# Altium PCB onV1.PcbDoc
Units mm, origin at the board's own origin, x right, y up, seen from the top; angles counter-clockwise.
Board outline 55 x 94 mm, 4 copper layers (Top Layer, Signal Layer 1, Signal Layer 2, Bottom Layer), stack 0.778 mm thick; 108 components, 42 nets, 287 pads, 47 vias.
Unrouted connection lines stored in the file: 108.
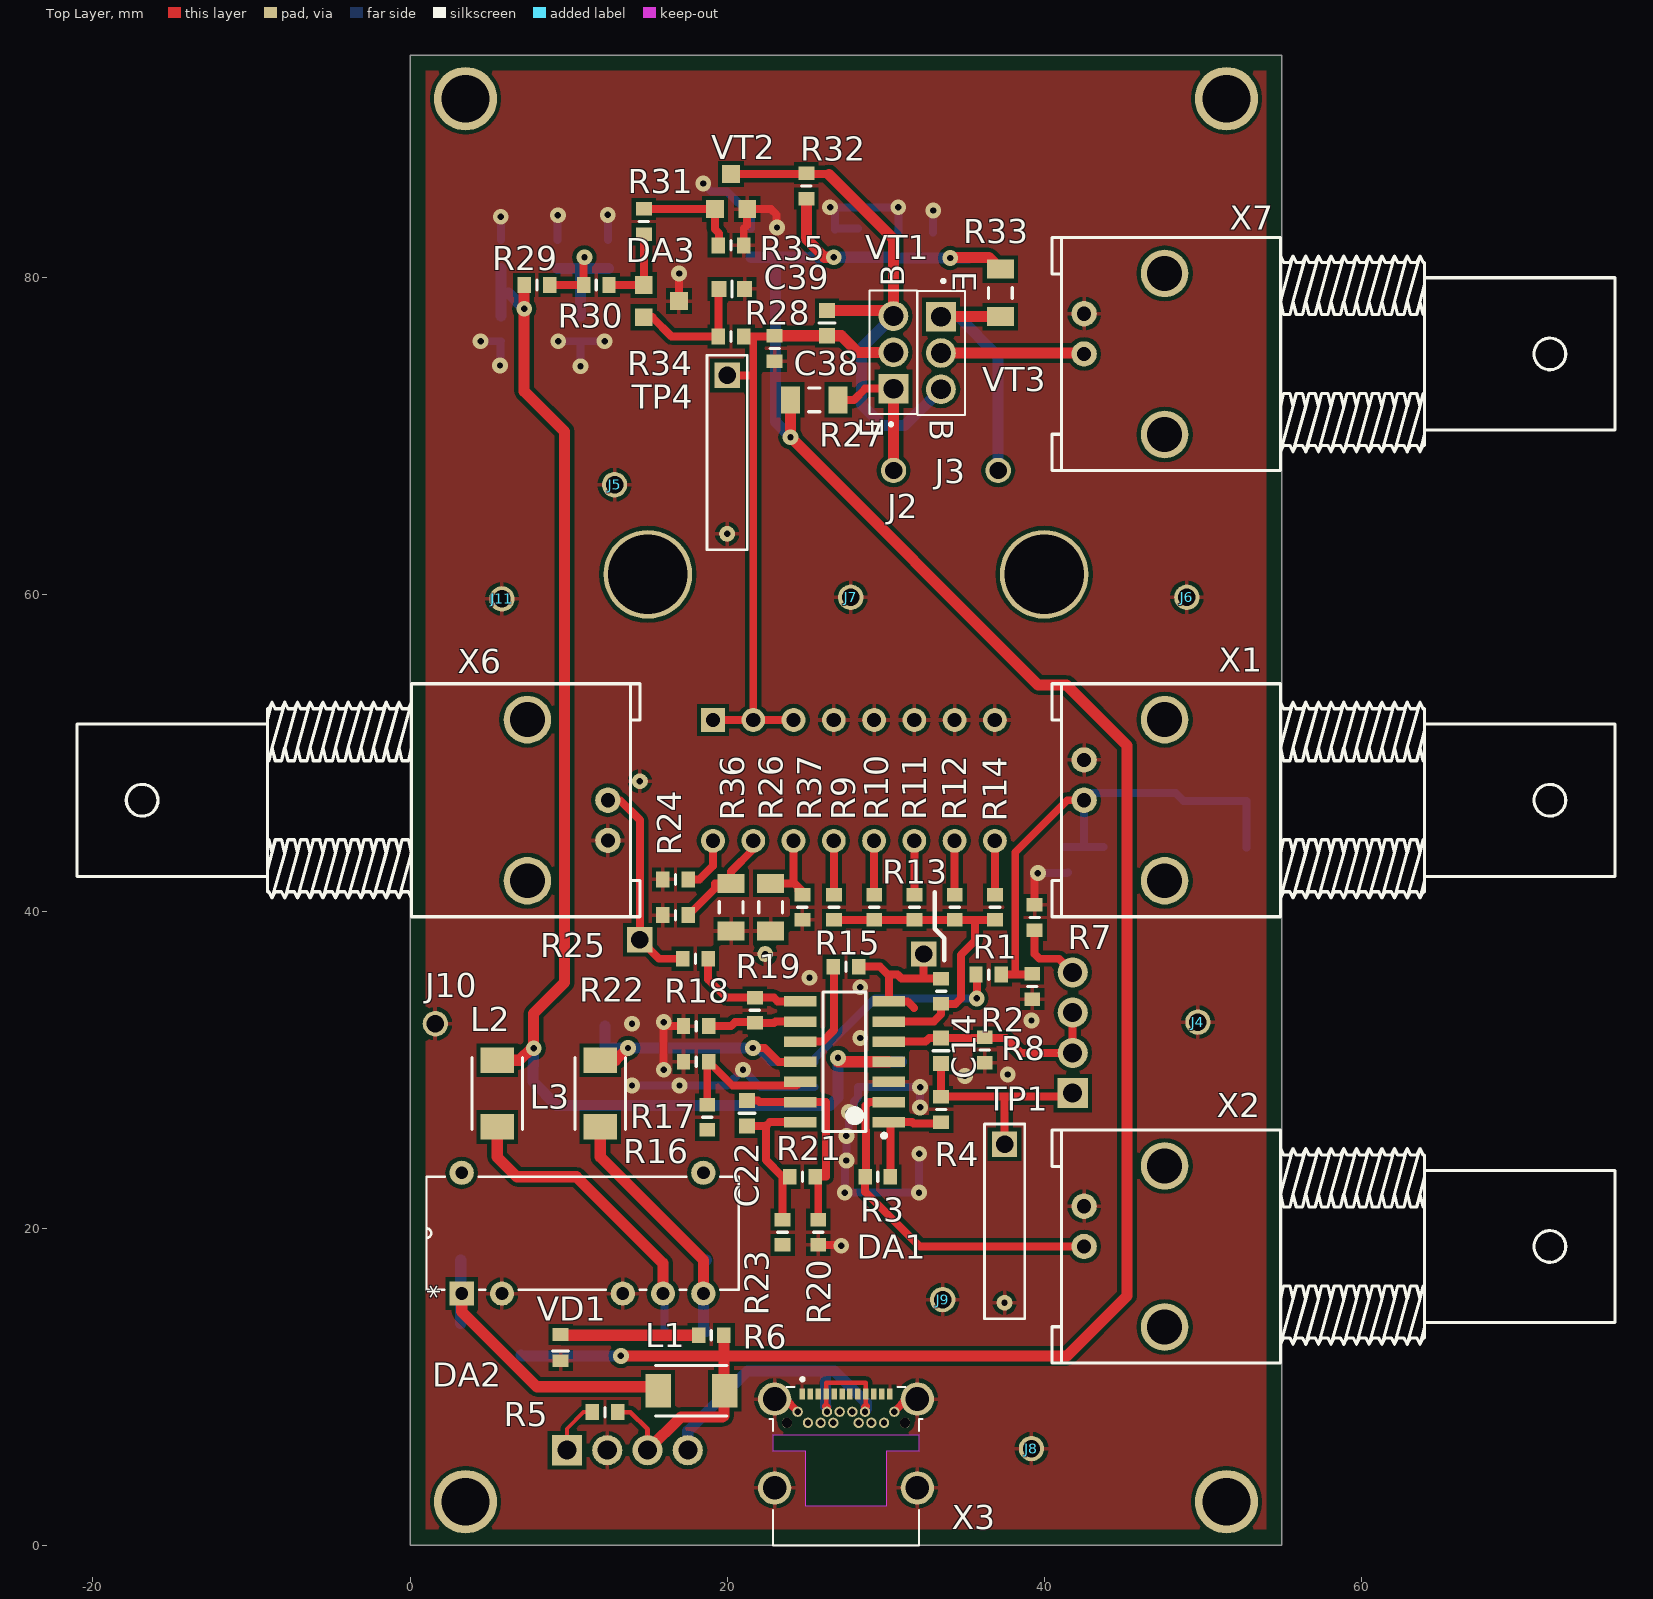
[diagram p0: Top Layer view]
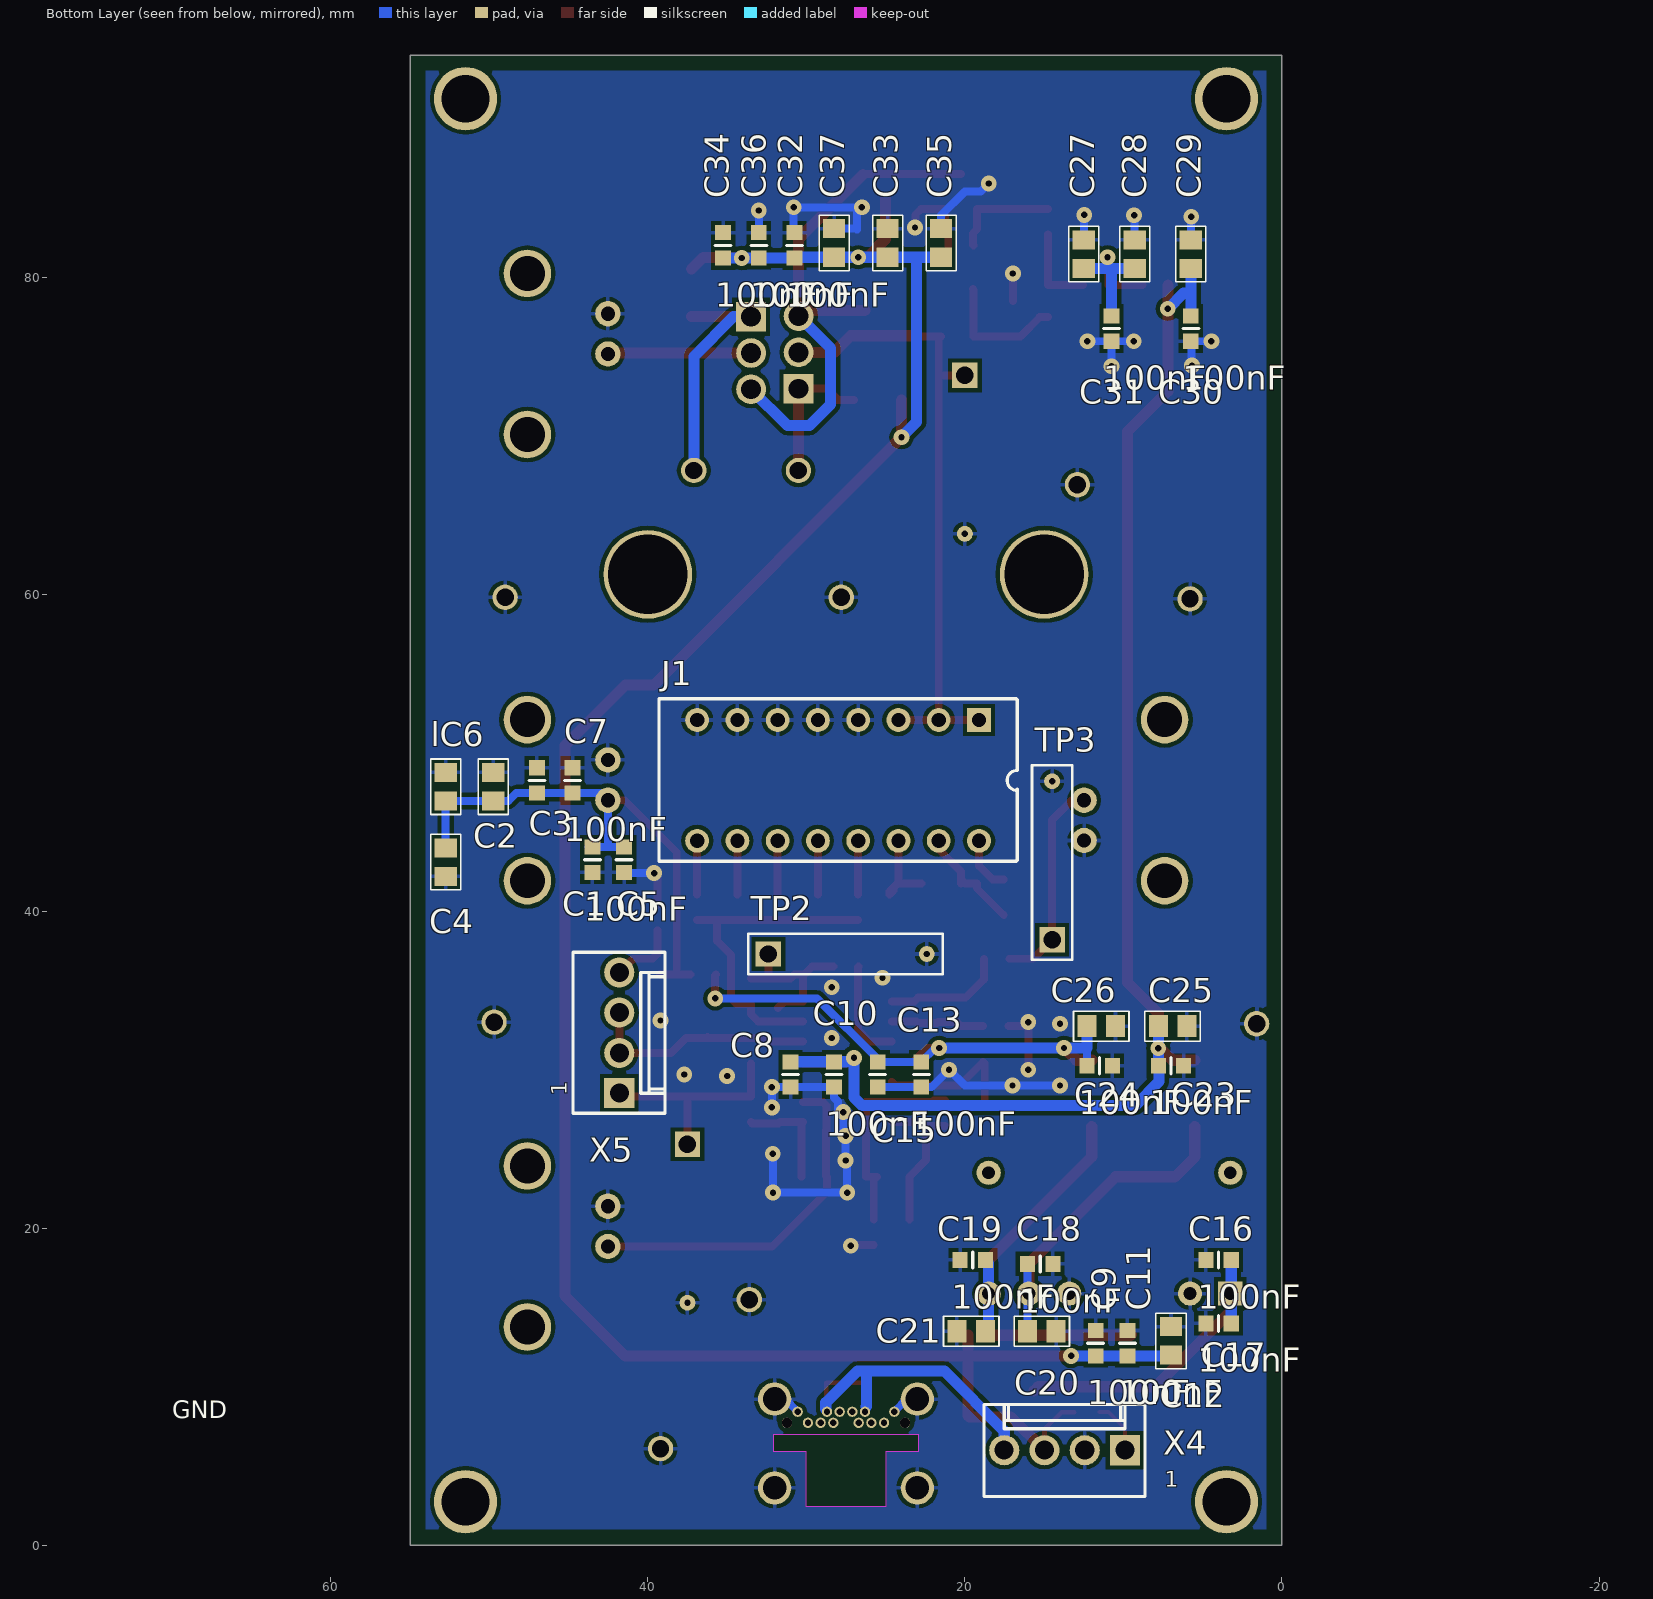
[diagram p1: Bottom Layer view, seen from below]
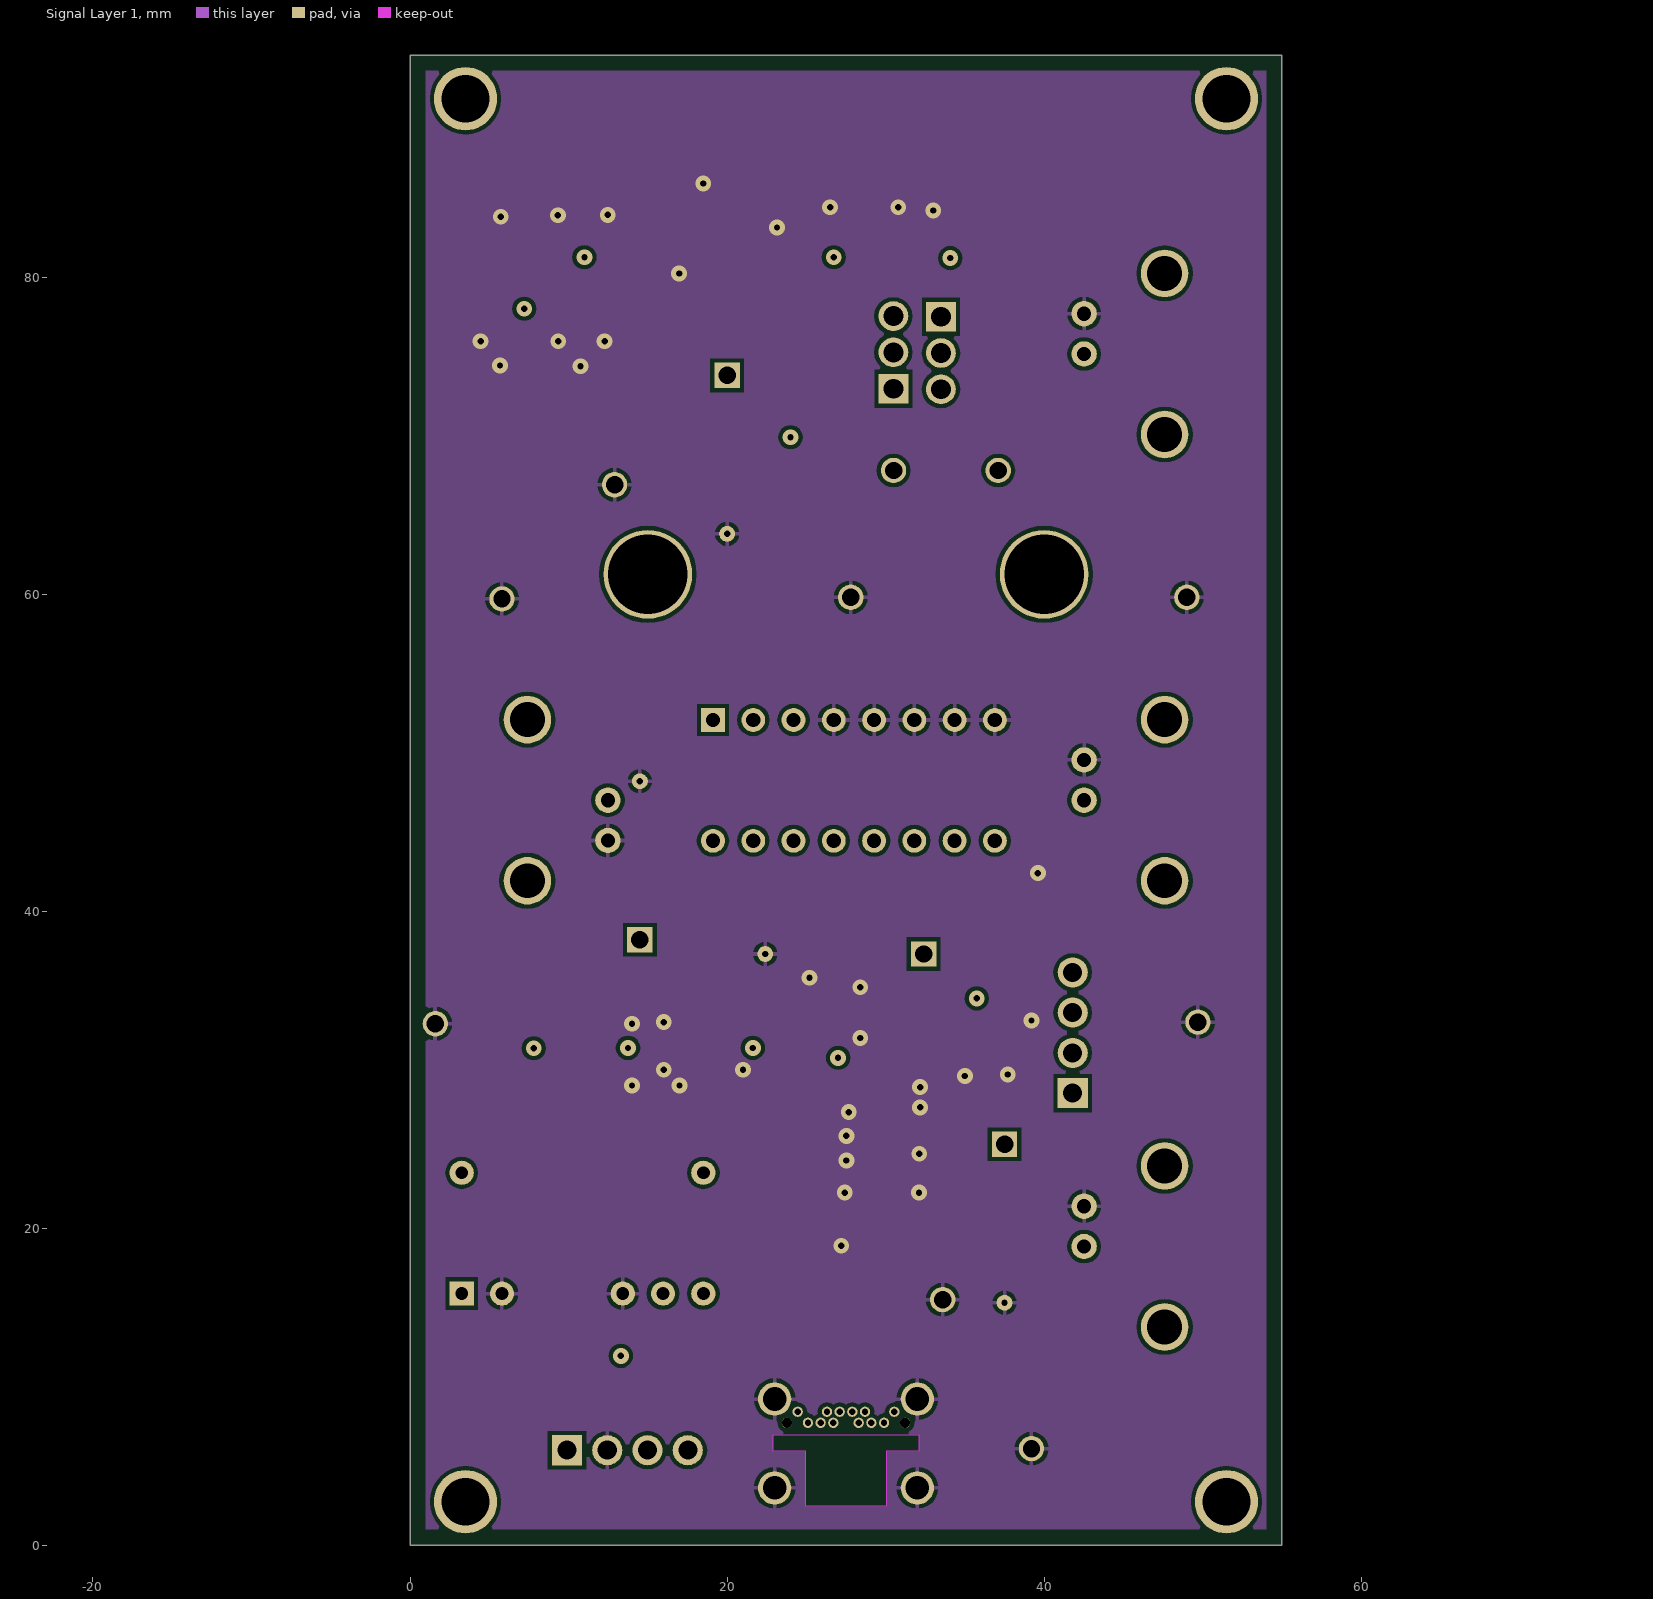
[diagram p2: Signal Layer 1]
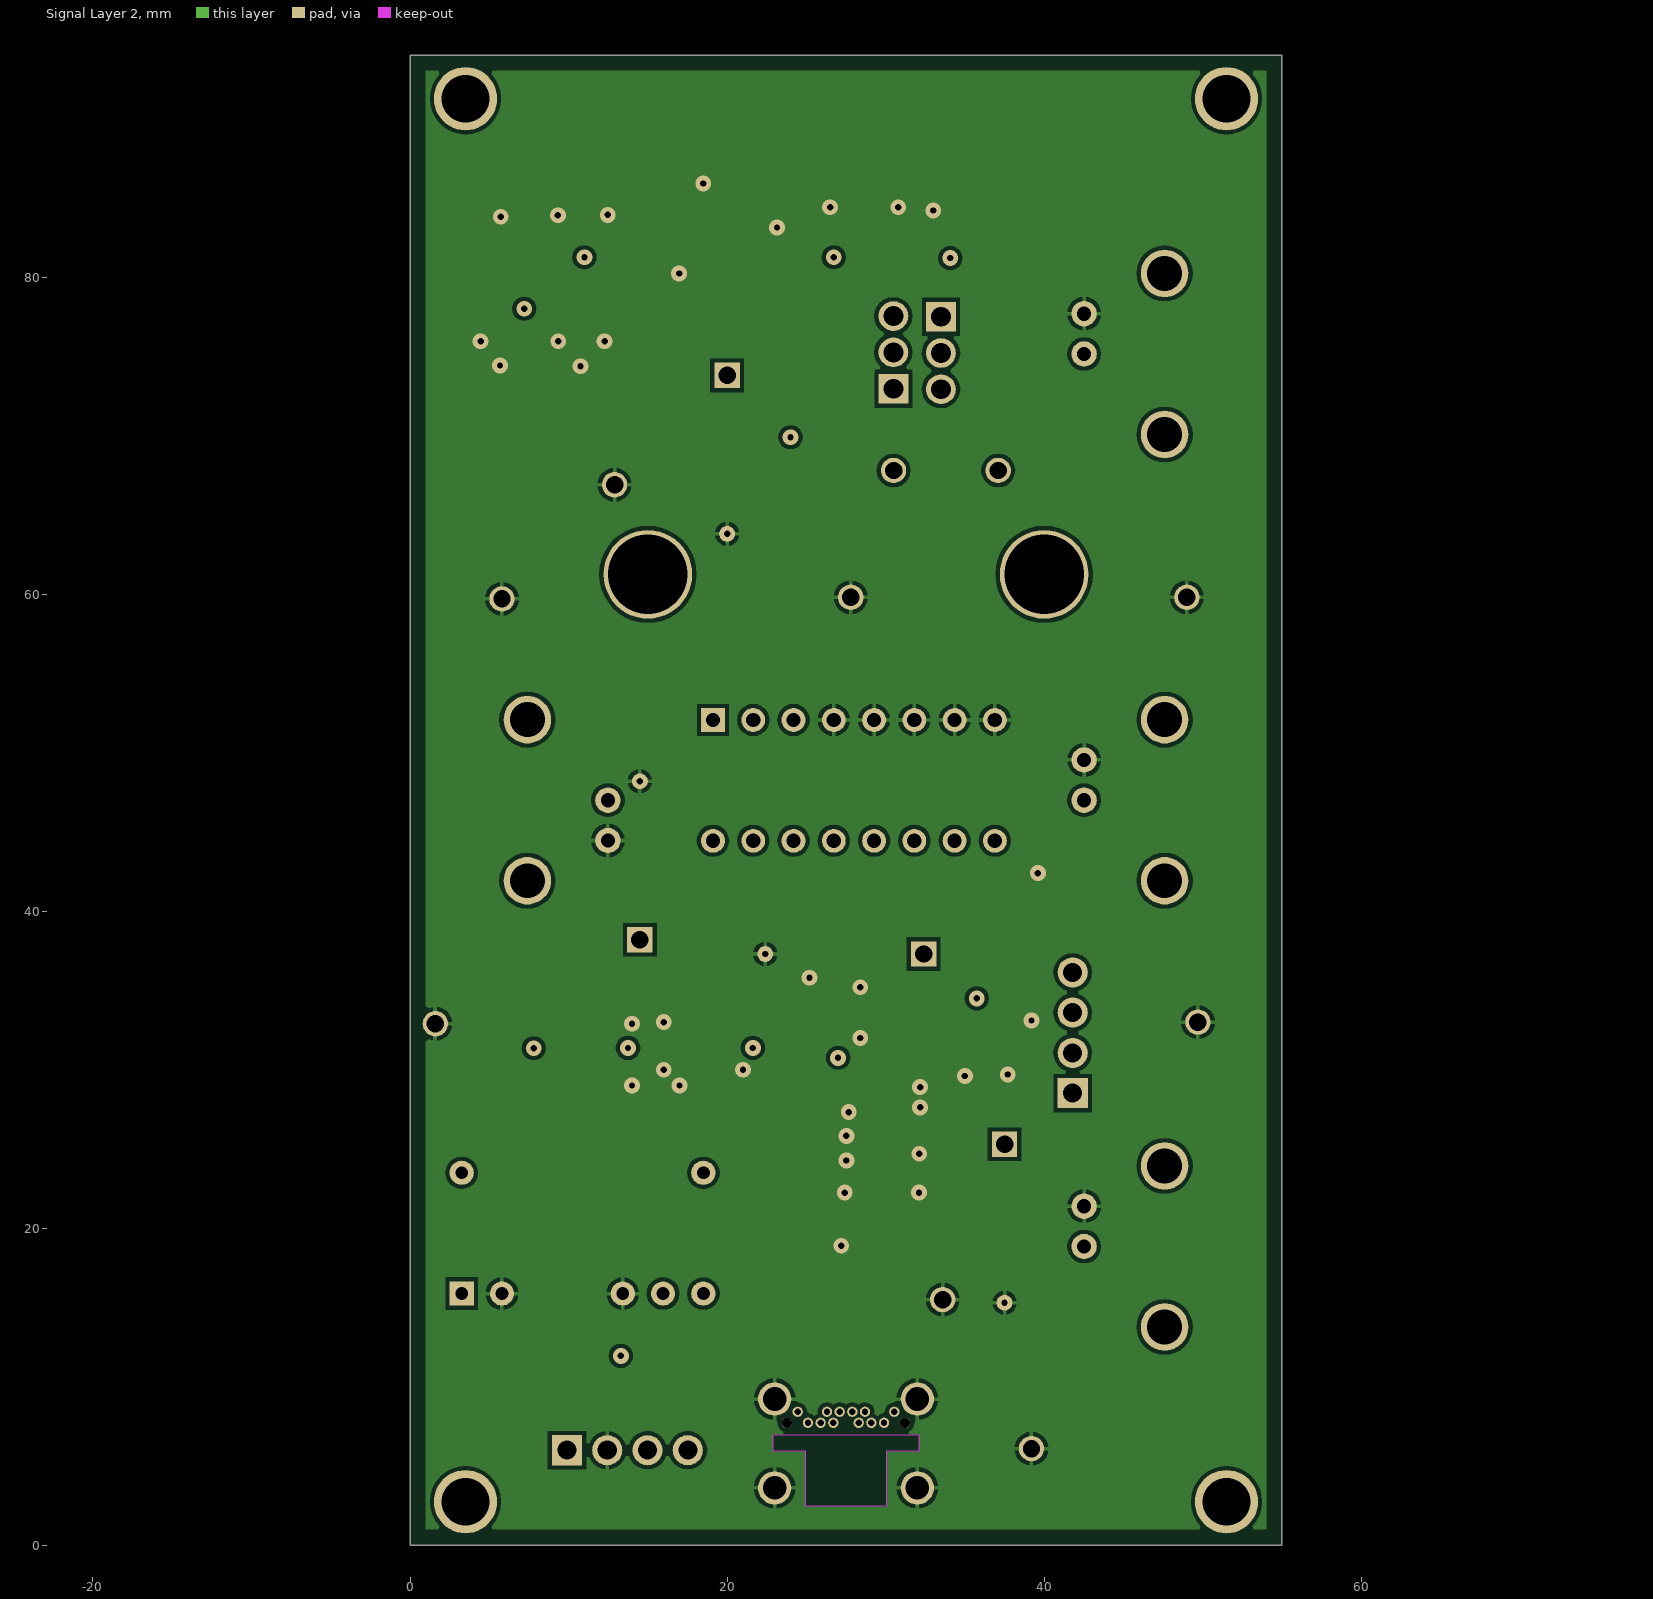
[diagram p3: Signal Layer 2]
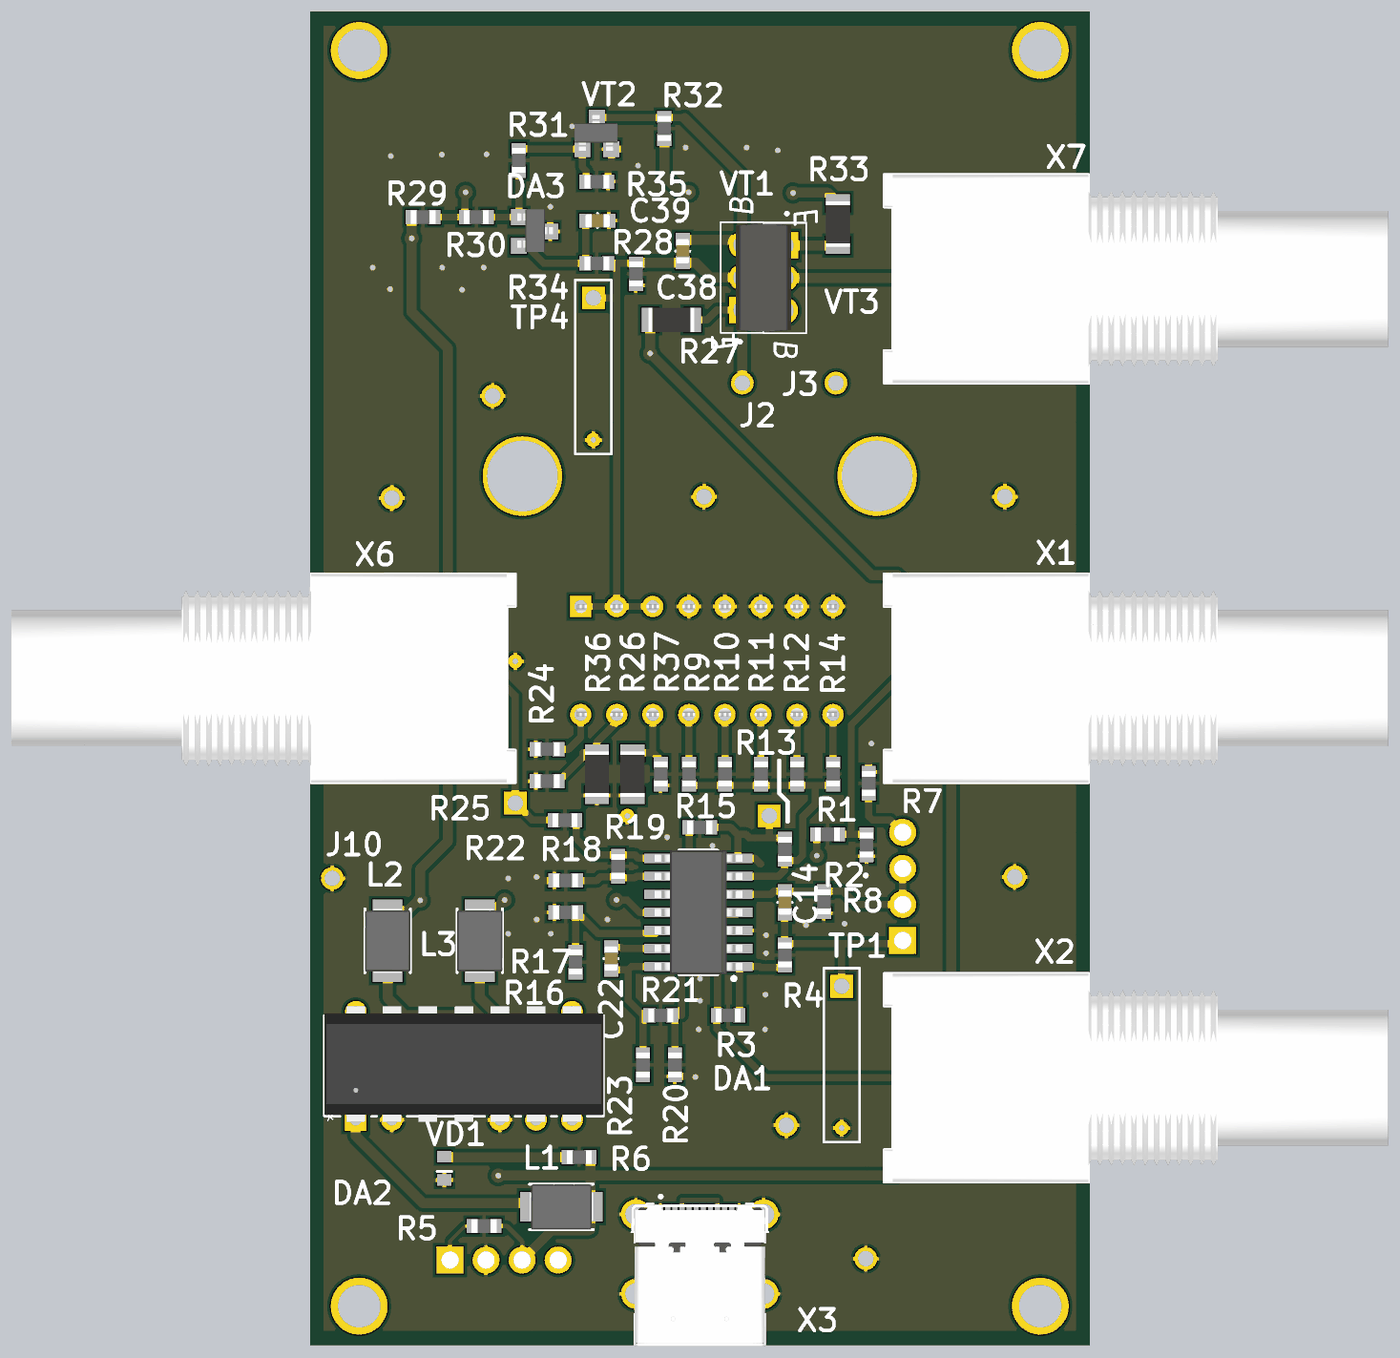
[diagram p4: 3D render of the assembled board from above, using the file's embedded part models]
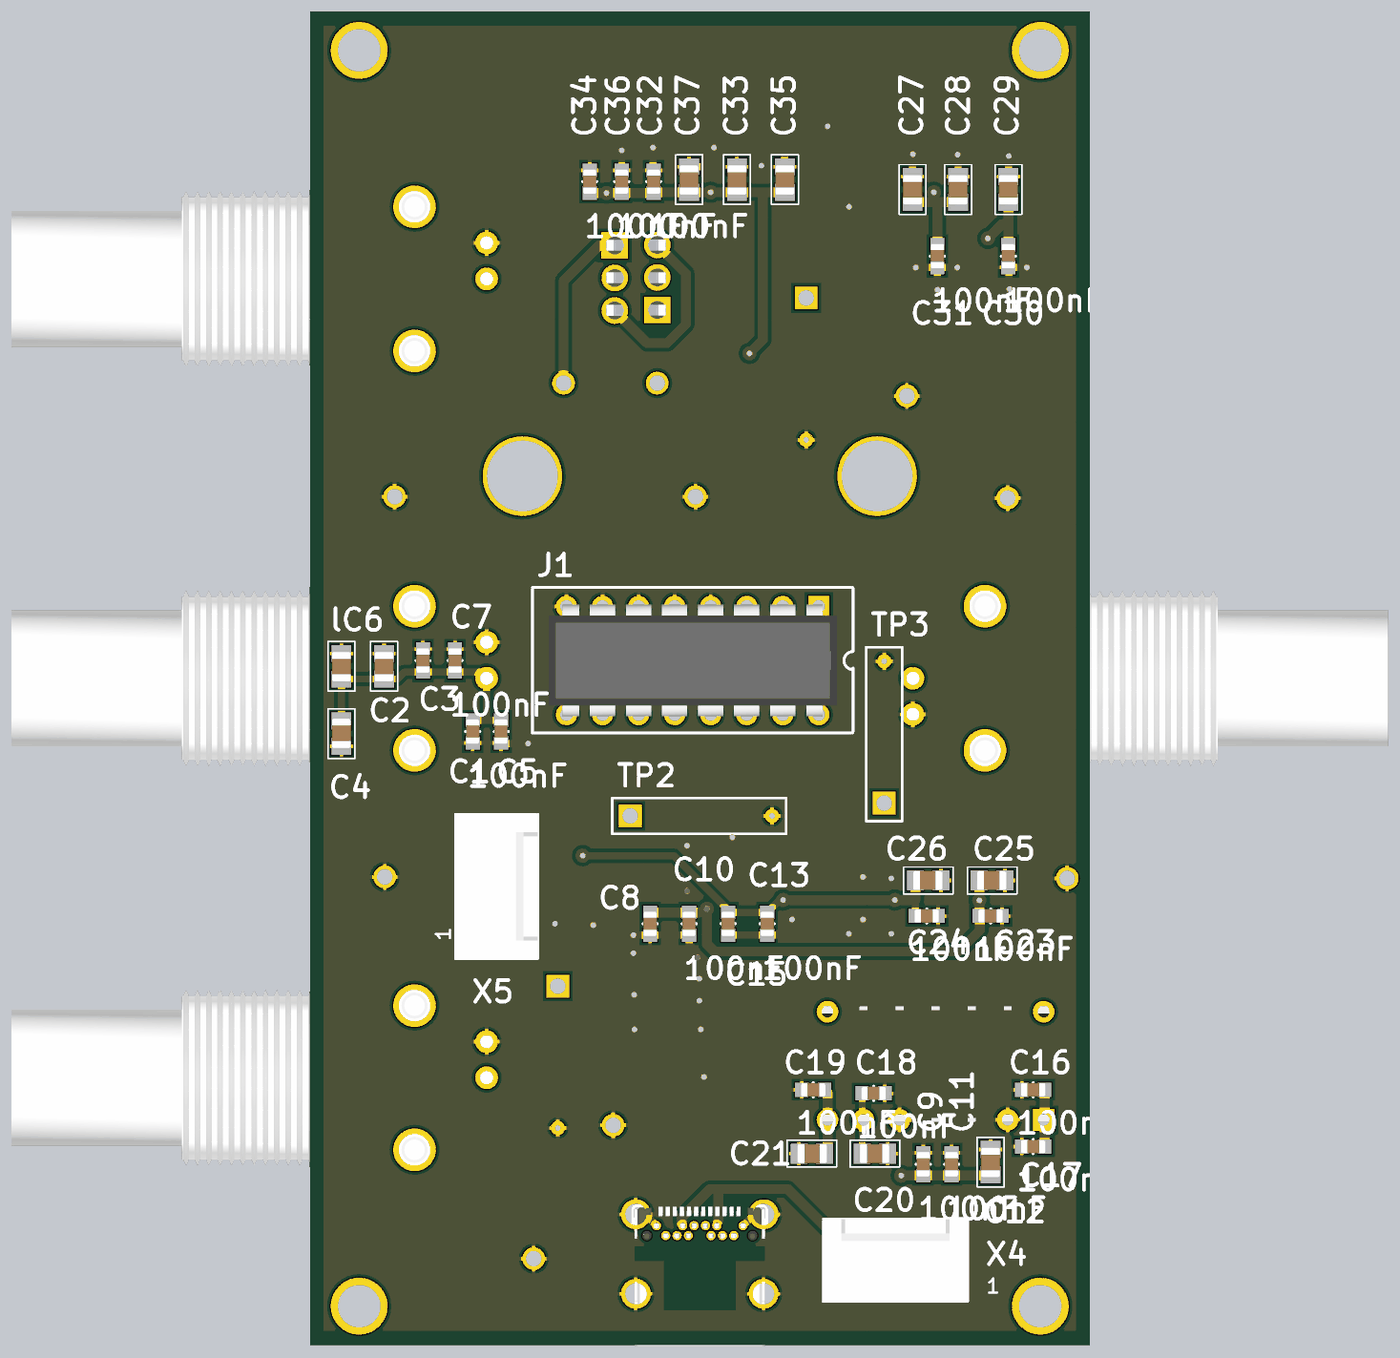
[diagram p5: 3D render of the assembled board from below, using the file's embedded part models]

## Layer stack, top to bottom
Top Solder: solder mask 0.0102, Solder Resist, Dk 3.5
Top Layer: signal copper 0.0356
Dielectric 1: core 0.254, FR-4, Dk 4.2
Signal Layer 1: signal copper 0.036
Dielectric 3: prepreg 0.127, Dk 4.2
Signal Layer 2: signal copper 0.036
Dielectric 2: core 0.254, Dk 4.2
Bottom Layer: signal copper 0.0356
Bottom Solder: solder mask 0.0102, Solder Resist, Dk 3.5

## Board outline
0,0 0,94 55,94 55,0

## Design rules (kind name [scope] priority, off if disabled: settings)
Clearance TopOverlay [OnLayer('Top Overlay') vs OnLayer('Top Layer')] p1: gap=0 ignorepadtopadclearanceinfootprint=TRUE except(0.254: Arc-Text Track-Text SMDPad-Text Via-Text Text-Text Text-Hole)
Clearance MultyBot [OnLayer('Bottom Layer') vs OnLayer('Multi-Layer')] p2: gap=0.254 ignorepadtopadclearanceinfootprint=TRUE except(0: Arc-Hole Track-Hole SMDPad-Hole THPad-Hole Via-Hole Fill-Hole Poly-Hole Region-Hole Text-Hole; 0.15: Arc-Arc Arc-Track Track-Track SMDPad-SMDPad; 0.2: Arc-SMDPad Arc-THPad Track-SMDPad Track-THPad)
Clearance MultyTop [OnLayer('Multi-Layer')] p3: gap=0.254 ignorepadtopadclearanceinfootprint=TRUE except(0: Arc-Hole Track-Hole SMDPad-Hole THPad-Hole Via-Hole Fill-Hole Poly-Hole Region-Hole Text-Hole; 0.15: Arc-SMDPad Arc-THPad Track-SMDPad Track-THPad SMDPad-SMDPad; 0.2: Arc-Arc Arc-Track Track-Track)
Clearance MulyMulty [OnLayer('Multi-Layer') vs OnLayer('Multi-Layer')] p4: gap=0.254 ignorepadtopadclearanceinfootprint=TRUE except(0: Arc-Hole Track-Hole SMDPad-Hole THPad-Hole Via-Hole Fill-Hole Poly-Hole Region-Hole Text-Hole; 0.2: Arc-Arc Arc-Track Arc-SMDPad Track-Track Track-SMDPad SMDPad-SMDPad)
Clearance TopTop [OnLayer('Top Layer') vs OnLayer('Top Layer')] p5: gap=0.254 ignorepadtopadclearanceinfootprint=TRUE except(0: Arc-Hole Track-Hole SMDPad-Hole THPad-Hole Via-Hole Fill-Hole Poly-Hole Region-Hole Text-Hole; 0.15: Arc-SMDPad Arc-THPad Track-SMDPad Track-THPad; 0.2: Arc-Arc Arc-Track Track-Track SMDPad-SMDPad)
Clearance BotBot [OnLayer('Bottom Layer') vs OnLayer('Bottom Layer')] p6: gap=0.254 ignorepadtopadclearanceinfootprint=TRUE except(0: Arc-Hole Track-Hole SMDPad-Hole THPad-Hole Via-Hole Fill-Hole Poly-Hole Region-Hole Text-Hole; 0.15: Arc-Arc Arc-Track Arc-THPad Track-Track Track-THPad SMDPad-SMDPad; 0.2: Arc-SMDPad Track-SMDPad)
Height [All] p1: minheight=0 maxheight=500 prefheight=12.7
HoleSize [All] p1: absolutevalues=TRUE maxlimit=10 minlimit=0.025 maxpercent=80.000 minpercent=20.000
PlaneConnect [All] p1: pad.planeconnectstyle=Relief pad.reliefexpansion=0.508 pad.reliefentries=4 pad.reliefconductorwidth=0.254 pad.reliefairgap=0.254 via.planeconnectstyle=Direct via.reliefexpansion=0.508 via.reliefentries=4 via.reliefconductorwidth=0.254 via.reliefairgap=0.254
PolygonConnect [All] p1: thpad.connectstyle=Relief thpad.reliefconductorwidth=0.254 thpad.reliefentries=4 thpad.polygonreliefangle="90 Angle" thpad.airgapwidth=0.254 smdpad.connectstyle=Relief smdpad.reliefconductorwidth=0.254 smdpad.reliefentries=4 smdpad.polygonreliefangle="90 Angle" smdpad.airgapwidth=0.254 via.connectstyle=Direct via.reliefconductorwidth=0.254 via.reliefentries=4 via.polygonreliefangle="90 Angle" via.airgapwidth=0.254
RoutingVias [All] p1: holewidth=0.4 width=1 viastyle="Through Hole" minholewidth=0.3 minwidth=0.9 maxholewidth=0.4 maxwidth=1
SolderMaskExpansion [All] p1: expansion=0.102
Width [All] p1: maxlimit=0.7 minlimit=0.15 preferedwidth=0.254 toplayer_prefwidth=0.25 midlayer1_minwidth=0.25 midlayer1_maxwidth=0.25 midlayer1_prefwidth=0.25 midlayer2_minwidth=0.25 midlayer2_maxwidth=0.25 midlayer2_prefwidth=0.25 bottomlayer_minwidth=0.2 minimp=50.000000 maximp=50.000000 favimp=50.000000
27 further rules are at their usual default settings.

## Components (designator, comment, footprint, x,y, rotation, side; value= is the part's Value field where it differs from the comment)
C1 "100nF" CAPC1608X87N 43.5,43.25 r270 bottom
C2 "10uF" SMD0805CAP 49.752,48.852 r270 bottom
C3 "10nF" CAPC1608X87N 47,48.25 r90 bottom
C4 "10uF" SMD0805CAP 52.748,42.098 r90 bottom
C5 "1nF" CAPC1608X87N 41.5,43.25 r270 bottom
C7 "100nF" CAPC1608X87N 44.75,48.25 r90 bottom
C8 "10nF" CAPC1608X87N 31,29.7 r90 bottom
C9 "100nF" CAPC1608X87N 11.75,12.75 r270 bottom
C10 "100nF" CAPC1608X87N 28.25,29.7 r90 bottom
C11 "100nF" CAPC1608X87N 9.75,12.75 r270 bottom
C12 "10uF" SMD0805CAP 7.002,13.902 r270 bottom
C13 "100nF" CAPC1608X87N 22.75,29.7 r90 bottom
C14 "100nF" CAPC1608X87N 33.5,31.2 r90 top
C15 "10nF" CAPC1608X87N 25.5,29.7 r90 bottom
C16 "100nF" CAPC1608X87N 4,18 r180 bottom
C17 "100nF" CAPC1608X87N 4,14 r180 bottom
C18 "100nF" CAPC1608X87N 15.25,17.75 r0 bottom
C19 "100nF" CAPC1608X87N 19.5,18 r180 bottom
C20 "10uF" SMD0805CAP 14.148,13.502 r0 bottom
C21 "10uF" SMD0805CAP 20.602,13.498 r180 bottom
C22 "100nF" CAPC1608X87N 21.25,27.25 r270 top
C23 "100nF" CAPC1608X87N 7,30.25 r0 bottom
C24 "100nF" CAPC1608X87N 11.5,30.25 r0 bottom
C25 "10uF" SMD0805CAP 5.898,32.752 r0 bottom
C26 "10uF" SMD0805CAP 10.398,32.752 r0 bottom
C27 "10uF" SMD0805CAP 12.502,82.452 r270 bottom
C28 "10uF" SMD0805CAP 9.293,82.452 r270 bottom
C29 "10uF" SMD0805CAP 5.752,82.452 r270 bottom
C30 "100nF" CAPC1608X87N 5.75,76.75 r90 bottom
C31 "100nF" CAPC1608X87N 10.75,76.75 r90 bottom
C32 "100nF" CAPC1608X87N 30.75,82 r270 bottom
C33 "10uF" SMD0805CAP 24.877,83.152 r270 bottom
C34 "100nF" CAPC1608X87N 35.25,82 r270 bottom
C35 "10uF" SMD0805CAP 21.502,83.152 r270 bottom
C36 "100nF" CAPC1608X87N 33,82 r270 bottom
C37 "10uF" SMD0805CAP 28.252,83.152 r270 bottom
C38 "1nF" CAPC1608X87N 26.3,77.1 r90 top
C39 "100nF" CAPC1608X87N 20.3,79.25 r180 top
DA1 "OPA1564D" SOIC14 27.5,30.5 r180 top
DA2 "DCP010507" NVA7 18.5,23.5 r90 top
DA3 "TL431DBZ" SOT-23 14.75,79.5 r270 top
J1 "DS1040-08RN" "DIP16-300 W" 28,48.25 r270 bottom
J2 "PLS1" PLS1 30.5,67.8 r0 top
J3 "PLS1" PLS1 37.1,67.8 r0 top
J4 "PLS1" PLS1 49.7,33 r0 top
J5 "PLS1" PLS1 12.9,66.9 r0 top
J6 "PLS1" PLS1 49,59.8 r0 top
J7 "PLS1" PLS1 27.8,59.8 r0 top
J8 "PLS1" PLS1 39.2,6.1 r0 top
J9 "PLS1" PLS1 33.6,15.5 r0 top
J10 "PLS1" PLS1 1.6,32.9 r0 top
J11 "PLS1" PLS1 5.8,59.7 r0 top
L1 "INDM4532X340N" INDM4532X340N 17.75,9.75 r180 top
L2 "INDM4532X340N" INDM4532X340N 5.5,28.5 r90 top
L3 "INDM4532X340N" INDM4532X340N 12,28.5 r90 top
lC6 "10uF" SMD0805CAP 52.752,48.852 r270 bottom (schematic designator C6)
R1 "10k" RESC1608X64N 36.5,36 r180 top
R2 "100k" RESC1608X64N 39.25,35.25 r90 top
R3 "1k" RESC1608X64N 29.5,23.25 r0 top
R4 "1k" RESC1608X64N 33.5,27.5 r90 top
R5 "3k" RESC1608X64N 12.3,8.4 r180 top
R6 "3k" RESC1608X64N 19,13.25 r0 top
R7 "300" RESC1608X64N 39.4,39.6 r270 top
R8 "51k" RESC1608X64N 36.25,31.25 r90 top
R9 "10k" RESC1608X64N 26.743,40.25 r270 top
R10 "5k1" RESC1608X64N 29.282,40.25 r270 top
R11 "2k4" RESC1608X64N 31.821,40.25 r270 top
R12 "1k2" RESC1608X64N 34.361,40.25 r270 top
R13 "10k" RESC1608X64N 33.5,34.95 r270 top
R14 "510" RESC1608X64N 36.9,40.25 r270 top
R15 "1k" RESC1608X64N 27.5,36.5 r180 top
R16 "1k" RESC1608X64N 18.75,27 r90 top
R17 "10k" RESC1608X64N 18.05,30.5 r0 top
R18 "1k" RESC1608X64N 18.05,32.75 r180 top
R19 "10k" RESC1608X64N 21.75,33.75 r90 top
R20 "1k" RESC1608X64N 25.75,19.75 r270 top
R21 "10k" RESC1608X64N 24.75,23.25 r180 top
R22 "300" RESC1608X64N 18,37 r180 top
R23 "300" RESC1608X64N 23.5,19.75 r270 top
R24 "2k" RESC1608X64N 16.75,42 r0 top
R25 "1k" RESC1608X64N 16.75,39.75 r0 top
R26 "51" RES1206 22.75,40.25 r90 top
R27 "51" RES1206 25.5,72.25 r180 top
R28 "3k9" RESC1608X64N 23,75.5 r90 top
R29 "300" RESC1608X64N 8,79.5 r180 top
R30 "300" RESC1608X64N 11.75,79.5 r180 top
R31 "100k" RESC1608X64N 14.75,83.5 r270 top
R32 "1k" RESC1608X64N 25,85.75 r270 top
R33 "5,1" RES1206 37.24,79 r90 top
R34 "6k8" RESC1608X64N 20.25,76.25 r0 top
R35 "51k" RESC1608X64N 20.25,82 r180 top
R36 "51" RES1206 20.25,40.25 r90 top
R37 "510" RESC1608X64N 24.75,40.25 r90 top
TP1 "OSC_TP" TP2 37.5,25.3 r270 top
TP2 "OSC_TP" TP2 32.4,37.3 r180 bottom
TP3 "OSC_TP" TP2 14.5,38.2 r90 bottom
TP4 "OSC_TP" TP2 20,73.8 r270 top
VD1 "POWER_ON" LED0603 9.5,12.25 r90 top
VT1 "BD138" TO229P780X300X1364-3 30.49,72.96 r90 top
VT2 "BC846" SOT-23 19.234,84.29 r0 top
VT3 "BD138" TO229P780X300X1364-3 33.49,77.5 r270 top
X1 "BNC_A" TYCO_1-1337542-0 48,47 r0 top
X2 "BNC_A" TYCO_1-1337542-0 48,18.85 r0 top
X3 "UJ31-CH-G2-SMT-TR" CUI_UJ31-CH-G2-SMT-TR 24.75,9.535 r0 top value="USB Type-C"
X4 "WF4" MOLEX_22-27-2041 13.71,6 r0 bottom
X5 "WF4" MOLEX_22-27-2041 41.8,32.33 r90 bottom
X6 "BNC_A" TYCO_1-1337542-0 7,47 r180 top
X7 "BNC_A" TYCO_1-1337542-0 48,75.15 r0 top

## Footprints (in the part's own frame and the unit in brackets; to place one, negate y for a bottom-side part, rotate by r counter-clockwise, add the part's x,y. Pads: shape width x height; smd on the part's side, far side on the other; paste and mask are expansions set on the pad)
CAPC1608X87N [mm] "Chip Capacitor, Body 1.6x0.8mm IPC Medium Density"
  rect 0.95x1 smd: 1(-0.8,0) 2(0.8,0)
  silkscreen extent 0,-0.5 0,0.5, body extent -0.87,-0.47 0.88,0.48, height 0.87
CUI_UJ31-CH-G2-SMT-TR [mm]
  rect 0.35x0.7 smd: A1(0,0) A2(0.5,0) A3(1,0) A4(1.5,0) A5(2,0) A6(2.5,0) A7(3,0) A8(3.5,0) A9(4,0) A10(4.5,0) A11(5,0) A12(5.5,0)
  round 0.65 hole 0.4: B1(5.8,-1.11) B2(5.15,-1.81) B3(4.35,-1.81) B4(3.95,-1.11) B5(3.55,-1.81) B6(3.15,-1.11) B7(2.35,-1.11) B8(1.95,-1.81) B9(1.55,-1.11) B10(1.15,-1.81) B11(0.35,-1.81) B12(-0.3,-1.11)
  round 2.1 hole 1.5: SH1(-1.75,-0.31) SH2(7.25,-0.31) SH3(-1.75,-5.91) SH4(7.25,-5.91)
  round 0.65 hole 0.65 unplated: ""(-0.975,-1.81) ""(6.475,-1.81)
  Keep-Out Layer region: 7.35,-3.6 5.3,-3.6 5.3,-7.06 0.2,-7.06 0.2,-3.6 -1.85,-3.6 -1.85,-2.56 7.35,-2.56
  silkscreen extent -2.07,-9.56 7.57,1.04, body extent -2.1,-9.6 7.61,0.4, height 3.43
"DIP16-300 W" [mm] "DIP 16 Leads, Row Spacing 7.62 mm; Pitch 2.54 mm"
  rect 1.5x1.5 hole 0.9: 1(-3.81,8.89)
  round 1.5 hole 0.9: 2(-3.81,6.35) 3(-3.81,3.81) 4(-3.81,1.27) 5(-3.81,-1.27) 6(-3.81,-3.81) 7(-3.81,-6.35) 8(-3.81,-8.89) 9(3.81,-8.89) 10(3.81,-6.35) 11(3.81,-3.81) 12(3.81,-1.27) 13(3.81,1.27) 14(3.81,3.81) 15(3.81,6.35) 16(3.81,8.89)
  silkscreen extent -5.15,-11.3 5.1,11.3, body extent -5.2,-11.3 5.1,11.3, height 7
INDM4532X340N [mm] "Inductor, Molded Body; 4.5mm L X 3.2mm W, IPC Medium Density"
  rect 1.6x2.1 smd: 1(-2.1,0) 2(2.1,0)
  silkscreen extent -2.25,-1.6 2.25,1.6, body extent -2.25,-1.6 2.25,1.6, height 3.4
LED0603 [mm] "Chip LED 0603, Body 2.25x1mm"
  rect 0.8x1 smd: 1(-0.6,0) 2(1.05,0)
  silkscreen extent 0,-0.5 0,0.5, body extent -0.67,-0.48 1.22,0.48, height 0.95
MOLEX_22-27-2041 [mm] "2.54mm (.100\") Pitch KK® Header, Single Row, Vertical, 4 Circuits"
  rect 1.9x1.9 hole 1.2: 1(-3.81,0)
  round 1.9 hole 1.2: 2(-1.27,0) 3(1.27,0) 4(3.81,0)
  silkscreen extent -5.08,-2.88 5.08,2.92, body extent -5.08,-2.88 5.08,2.92, height 11.7
NVA7 [mil]
  rect 60x60 hole 32: 1(-300,600)
  round 60 hole 32: 2(-300,500) 5(-300,200) 6(-300,100) 7(-300,0) 8(0,0) 14(0,600)
  silkscreen extent -290,-88 -10,688, body extent -305,-87 15,687, height 215
PLS1 [mm]
  round 1.6 hole 1.1: 1(0,0)
RES1206 [mm] "Chip Resistor, 2-Leads, Body 3,10x1,60mm, IPC Medium Density"
  rect 1.2x1.7 smd: 1(-1.5,0) 2(1.5,0)
  silkscreen extent -0.35,-0.75 0.35,0.75, body extent -1.6,-0.85 1.6,0.85, height 0.6
RESC1608X64N [mm] "Chip Resistor, EIA 0603, Metric 1608, Body 1.6x0.8mm, IPC Medium Density"
  rect 0.85x1 smd: 1(-0.8,0) 2(0.8,0)
  silkscreen extent 0,-0.3 0,0.3, body extent -0.87,-0.48 0.87,0.48, height 0.64
SMD0805CAP [mm] "Чипконденсатор, 2.0x1.3mm"
  rect 1.2x1.4 smd: 1(0.102,0.002) 2(1.902,0.002)
  silkscreen extent -0.75,-0.95 2.75,0.95, body extent -0.02,-0.67 2.08,0.68, height 0.9
SOIC14 [mil] "SOIC 14, Pitch 1.27mm - Body 4x8.75mm, IPC Medium Density"
  rect 80x26 smd: 1(-106.3,150) 2(-106.3,100) 3(-106.3,50) 4(-106.3,0) 5(-106.3,-50) 6(-106.3,-100) 7(-106.3,-150) 8(113.7,-150) 9(113.7,-100) 10(113.7,-50) 11(113.7,0) 12(113.7,50) 13(113.7,100) 14(113.7,150)
  silkscreen extent -99,-173 57,188, body extent -119,-172 126,172, height 69
SOT-23 [mil]
  rect 44x44 smd: 1(0,0) 2(80,0) 3(40,87)
  body extent -22,-4 96,94, height 43
TO229P780X300X1364-3 [mm]
  rect 1.875x1.875 hole 1.25: 1(0,0)
  round 1.875 hole 1.25: 2(2.29,0) 3(4.58,0)
  silkscreen extent -2.35,-1.49 6.19,1.51, body extent -1.53,-3.15 6.07,1.83, height 20.47
TP2 [mm]
  rect 1.6x1.6 hole 1.1: 1(0,0)
  round 1 hole 0.4: 2(10,0)
  silkscreen extent -1.27,-1.27 11,1.27
TYCO_1-1337542-0 [mm] "50 Ohms  BNC Elbow PCB Socket With Mounting Posts"
  round 3 hole 2.2: 0(-0.4,-5.08) 0(-0.4,5.08)
  round 1.6 hole 0.9: 1(-5.48,0) 2(-5.48,2.54)
  silkscreen extent -7.5,-7.35 28,7.35, body extent -7.5,-7.35 28,7.35, height 13.16

## Part data
C1 C3 C5 C7 C8 C9 C10 C11 C13 C14 C15 C16 C17 C18 C19 C22 C23 C24 C30 C31 C32 C34 C36 C38 C39: library part C0603, "Чип конденсатор 0603", DielectricType=Y5V, Voltage=50V, Price=2, SolderOption=Norm, Tol=20%, Vendor=Generic
C2 C4 C12 C20 C21 C25 C26 C27 C28 C29 C33 C35 C37 lC6: library part C0805, "Чип конденсатор 0805", DielectricType=Y5V, Voltage=50V, Price=2, SolderOption=Norm, Tol=20%, Vendor=Generic
DA1: "счетверённый ОУ JFED", Voltage="4.5V.. 36V/+-2.25..+-18V", Bandwidth=18MHz, Price=800, SolderOption=Norm, Vendor="Texas Instruments"
DA2: "DC/DC 5V to isolated +-7V", Copyright="Copyright (C) 2022 Ultra Librarian. All rights reserved.", Price=1000, Vendor="Texas Instruments"
DA3: "Adjustable voltage reference", Package=SOT23, Unit Price=1, Vendor=TI
J1: "DIP переключатель 8x2.54", Price=50, SolderOption=Norm, Vendor=Connfly
J2 J3 J4 J5 J6 J7 J8 J9 J10 J11: "Штырь PLS1", Price=1, SolderOption=Norm
L1 L2 L3: "SMD Дроссель", Inductance=220uH, Curent=0.5A, Price=100, Vendor=Sumida
R1 R2 R3 R4 R5 R6 R7 R8 R9 R10 R11 R12 R13 R14 R15 R16 R17 R18 R19 R20 R21 R22 R23 R24 R25 R28 R29 R30 R31 R32 R34 R35 R37: library part R0603, "Чип резистор 0603", Tolerance=5%, Price=2, TC=+-100ppm/C, Vendor=Generic
  R1 R2 R3 R4 R5 R6 R7 R8 R9 R10 R11 R12 R13 R14 R15 R16 R17 R19 R21 R22 R23 R24 R25 R28 R29 R30 R31 R32 R34 R35 R37: SolderOption=Norm
  R18 R20: SolderOption=NP
R26 R27 R33 R36: library part R1206, "Чип резистор 1206", Tolerance=5%, Price=2, SolderOpton=Norm, TC=+-100ppm/C, Vendor=Generic
TP1 TP2 TP3 TP4: library part OscTP, "Контрольная точка для подключения осциллографа короткой землёй", Price=0, SolderOption=PCB, Vendor=PCB
VD1: library part LED0603, "Чип светодиод 0603", Color=Green, Price=20, SolderOpton=Norm, Vendor=KB
VT1 VT3: "PNP  средней мощности (КГ814)", Voltage=40-100, Price=50, SolderOption=Norm, Vendor=OneSemi
VT2: "NPN транзистор", Voltage=65V, Price=25, SolderOption=Norm, Vendor=NXP
X1 X2 X6 X7: "BNC розетка", PartNum=TYCO_1-1337542-0, Price=500, SolderOption=Norm, Vendor=TYCO
X3: "Type C, USB 3.1 Gen 2, 5 A, Right Angle, Surface Mount (SMT), USB Receptacle", Package=None, Check_prices=https://www.snapeda.com/parts/UJ31-CH-G2-SMT-TR/CUI+Devices/view-part/?ref=eda, CUI_purchase_URL=https://www.cuidevices.com/product/interconnect/connectors/usb-connectors/uj31-ch-g2-smt-tr?utm_source=snapeda.com&utm_medium=referral&utm_campaign=snapedaBOM, MF="CUI Devices", Part_N=UJ31-CH-G2-SMT-TR, Price=75, Purchase-URL=https://pricing.snapeda.com/search/part/UJ31-CH-G2-SMT-TR/?ref=eda, SnapEDA_Link=https://www.snapeda.com/parts/UJ31-CH-G2-SMT-TR/CUI+Devices/view-part/?ref=snap
X4 X5: "Вилка  WF4x2.54", Price=25, SolderOption=Norm, Vendor=Confly
  X4: ConnectTo=PowerInd
  X5: ConnectTo=PowerIn

## Free pads (board coordinates)
  round 4 hole 3: 0(3.5,2.75) 0(3.5,91.25) 0(51.5,2.75) 0(51.5,91.25)
  round 5.6 hole 5: 0(15,61.25) 0(40,61.25)

## Via types
v1: diameter 1, hole 0.4, Top Layer to Bottom Layer, tented both sides, 47 vias

## Nets (pads, with @x,y where several pads share a name; then routed paths per layer and width w, separated by ;. In a path a pad name is that pad's centre, name@x,y a point inside that pad or via, vN(x,y) a via of type N, cw(c..) or ccw(c..) an arc to the next point about the centre after c; other vN are vias at no path point)
+5: C9.2 C11.2 C12.2 C32.2 C33.2 C34.2 C35.2 C36.2 C37.2 L1.1 R5.1 R6.2 R27.2 R32.2 R33.2 X4.3 | length 154.7
  Top Layer w0.3: R5.1 13.9,8.4 14.98,7.32 X4.3
  Top Layer w0.7: v1(13.3,11.95) 19.6,11.95 19.8,12.15 ; X4.3 17.08,8.1 19.7,8.1 19.75,8.15 19.8,8.15 L1.1@19.8,9.8 ; R6.2 19.8,12.15 ; L1.1 L1.1@19.8,9.8 ; R27.2 v1(24,69.9) 39.625,54.275 41.4,54.275 45.225,50.45 45.225,15.725 41.45,11.95 19.8,11.95 ; R32.2 25,82.4 26.15,81.25 v1(26.725,81.25) ; v1(34.075,81.2) 34.1,81.225 36.515,81.225 R33.2 ; L1.1@19.8,9.8 19.8,11.95 ; 19.8,11.95 19.8,12.15
  Bottom Layer w0.7: C12.2 7.05,11.95 C11.2 C9.2 v1(13.3,11.95) ; X4.3 15,6.02 X4.3@15,6.5 ; C35.2 23.05,81.25 ; v1(24,69.9) 23.05,70.85 23.05,81.25 ; C33.2 23.05,81.25 ; C33.2@25.25,81.25 C37.2 30.7,81.25 C32.2 C36.2 C34.2
+V: C8.2 C10.2 C23.2 C25.2 C29.2 C30.2 DA1.4 L2.2 R29.2 | length 90.5
  Top Layer w0.7: L2.2 6.9,30.6 7.65,31.35 v1(7.8,31.35) 7.8,33.55 9.75,35.5 9.75,70.25 7.2,72.8 v1(7.2,78) R29.2 ; v1(27,30.75) 27,30.5 DA1.4
  Bottom Layer w0.7: C30.2 5.75,79 ; C29.2 5.75,79 ; v1(7.2,78) 6.2,79 5.75,79 ; C25.2 v1(7.8,31.35) C23.2 7.75,30.2 7.75,29.25 9.25,27.75 26.5,27.75 27,28.25 v1(27,30.75) ; 27.5,30.5 C10.2 C8.2
-V: C13.2 C15.2 C24.2 C26.2 DA1.11 L3.2 R1.2 | length 35.5
  Top Layer w0.5: v1(21.625,31.375) 22.375,31.375 23.25,30.5 DA1.11 ; R1.2 35.75,35.95 v1(35.75,34.5)
  Top Layer w0.7: L3.2 12.975,30.6 v1(13.75,31.375)
  Bottom Layer w0.5: C24.2 12.3,31.375 ; v1(21.625,31.375) 21.125,31.375 21.875,31.375 C13.2 C15.2 25.5,30.67 29.33,34.5 v1(35.75,34.5)
  Bottom Layer w0.7: C26.2 12.3,31.375 v1(13.75,31.375) v1@21.125,31.375
GND: C1.2 C2.1 C3.2 C4.1 C5.2 C7.2 C8.1 C9.1 C10.1 C11.1 C12.1 C13.1 C15.1 C16.1 C17.1 C18.1 C19.1 C20.1 C21.1 C23.1 C24.1 C25.1 C26.1 C27.1 C28.1 C29.1 C30.1 C31.1 C32.1 C33.1 C34.1 C35.1 C36.1 C37.1 C39.1 DA1.3 DA2.2 DA2.5 DA3.3 J1.4 J1.5 J1.6 J1.7 J1.8 J4.1 J5.1 J6.1 J7.1 J8.1 J9.1 J10.1 J11.1 lC6.1 R2.1 R7.1 R8.1 R17.1 R18.2 R20.2 R24.1 R25.1 R26.1 R28.1 R35.1 R36.1 R37.1 TP1.2 TP2.2 TP3.2 TP4.2 VD1.1 VT2.2 X1.2 X2.2 X3.A1 X3.A12 X3.B1 X3.B12 X3.SH1 X3.SH2 X3.SH3 X3.SH4 X4.2 X6.2 X7.2 | length 84.3
  Top Layer w0.5: v1(16,30) v1(16,33) 16.25,32.75 R18.2 ; DA3.3 16.96,80.21 v1(16.975,80.225) ; R35.1 21.05,83.05 21.266,83.266 VT2.2 22.76,84.29 23.125,83.925 23.125,83.15 v1(23.15,83.125) ; X3.SH1 23.65,9.225 X3.B12 ; R20.2 27.15,18.95 v1(27.2,18.9) ; X3.B1 31.35,9.225 X3.SH2 ; R7.1 39.4,42.2 v1(39.6,42.4)
  Bottom Layer w0.5: v1(4.45,75.95) C30.1 5.7,75.9 5.7,74.45 v1(5.675,74.425) ; v1(5.725,83.8) 5.75,83.8 C29.1 ; C28.1 9.292,83.867 v1(9.325,83.9) ; v1(9.35,75.95) v1(12.275,75.95) C31.1 v1(10.75,74.375) v1@10.75,74.35 ; v1(12.475,83.925) 12.5,83.95 C27.1 ; v1(14,29) v1(17,29) 20,29 v1(21,30) 22.1,28.9 C13.1 C15.1 ; v1(18.5,85.9) 19,85.4 20,85.4 21.5,83.9 C35.1 ; X3.SH1 23.65,9.225 X3.B12 ; v1@27.525,24.225 v1(27.525,24.275) ; v1(27.675,27.325) 27.675,25.975 v1(27.525,25.825) v1(27.525,24.275) ; v1@28,27.325 28,28 28.25,28.25 C10.1 C8.1 v1(32.175,28.9) v1(32.175,27.625) ; C37.1 26.85,83.05 26.8,83 26.8,84.1 v1(26.5,84.4) v1(30.8,84.4) 30.8,82.85 C32.1 ; X3.B1 31.35,9.225 X3.SH2 ; v1(32.125,24.7) 32.1,24.675 v1(32.1,22.25) v1(27.425,22.25) 27.425,24.175 v1(27.525,24.275) ; C36.1 33,84.3 v1(33,84.2) ; v1(39.6,42.4) 41.45,42.4 C5.2
  other v1: 35,29.6 37.7,29.7 28.4,32 14,32.9 39.2,33.1 28.4,35.2 25.2,35.8
NetC1_1: C1.1 C2.2 C3.1 C4.2 C5.1 C7.1 lC6.2 R1.1 R2.2 X1.1 | length 34.4
  Top Layer w0.5: R1.1 38.175,36 ; R2.2 39.2,36 38.175,36 ; X1.1 41.457,47 38.175,43.718 38.175,36
  Bottom Layer w0.5: C5.1@41.25,44.05 C5.1 42.52,44.05 ; C1.1@43.75,44.05 C1.1 42.52,44.05 ; C4.2 lC6.2 C2.2 48.8,46.95 48.3,47.45 C3.1 C7.1 42.97,47.45 X1.1 42.52,44.05
NetC14_1: C14.1 R4.2 TP1.1 X5.1 | length 13.6
  Top Layer w0.5: C14.1 R4.2 37.5,28.3 ; TP1.1 37.5,28.3 ; X5.1 41.624,28.696 41.228,28.3 37.5,28.3
NetC14_2: C14.2 DA1.5 R8.2 X5.2 X5.3 | length 14.7
  Top Layer w0.508: DA1.5 32.52,31.77 32.75,32 C14.2 R8.2@36.2,32 ; R8.2 R8.2@36.2,32 ; X5.3 X5.2 38.54,31.06 37.6,32 R8.2@36.2,32
NetC16_2: C16.2 C17.2 DA2.1 L1.2 | length 19.6
  Top Layer w0.7: DA2.1 3.26,14.74 8,10 15.4,10 L1.2
  Bottom Layer w0.7: C17.2 3.2,15.82 DA2.1 3.2,15.94 C16.2
NetC18_2: C18.2 C20.2 DA2.6 L2.1 | length 21.4
  Top Layer w0.7: L2.1 5.5,24.5 6.754,23.246 10.504,23.246 15.96,17.79 DA2.6
  Bottom Layer w0.5: C20.2 16.05,15.79 DA2.6 15.96,16.21 16.05,16.3 C18.2
NetC19_2: C19.2 C21.2 DA2.7 L3.1 | length 17.9
  Top Layer w0.7: L3.1 12,24.5 18.5,18 DA2.7
  Bottom Layer w0.7: C21.2 18.5,13.7 DA2.7 18.5,17.8 C19.2
NetC22_1: C22.1 DA1.13 R20.1 R21.1 | length 13.2
  Top Layer w0.5: C22.1 21.95,28.05 22.04,27.96 DA1.13 26.225,27.96 26.225,23.25 R21.1 25.75,23.05 R20.1
NetC22_2: C22.2 DA1.14 R21.2 R23.1 | length 9.8
  Top Layer w0.5: C22.2 22.45,26.45 ; R23.1 23.5,23.25 22.45,24.3 22.45,26.45 ; DA1.14 22.69,26.69 22.45,26.45
NetC27_2: C27.2 C28.2 C31.2 R29.1 R30.2 | length 10.9
  Top Layer w0.5: R29.1 R30.2 10.95,81.2 v1(11,81.25)
  Bottom Layer w0.5: 10.75,80.55 11,80.8 v1(11,81.25)
  Bottom Layer w0.7: C28.2 10.75,80.55 ; C31.2 10.75,80.55 ; C27.2 10.75,80.55
NetC38_1: C38.1 J1.1 J1.2 J1.3 R28.2 R34.2 TP4.1 VT1.2 | length 40.4
  Top Layer w0.5: J1.1 J1.2 ; TP4.1 21.65,73.8 ; R28.2 22.95,76.25 21.5,76.25 21.65,76.1 21.65,73.8 ; J1.3 J1.2 ; J1.2 21.65,73.8
  Top Layer w0.7: R28.2 25.5,76.3 27.2,76.3 28.25,75.25 VT1.2
NetC38_2: C38.2 R32.1 VT1.3 VT2.3 VT3.3 | length 34.2
  Top Layer w0.5: VT2.3 R32.1@24.95,86.5 ; R32.1 R32.1@24.95,86.5 ; 26.425,86.475 26.4,86.5 R32.1@24.95,86.5
  Top Layer w0.7: C38.2 30.13,77.9 VT1.3 30.49,82.41 26.425,86.475
  Bottom Layer w0.7: VT1.3 28.475,75.525 28.475,71.95 29.8,70.625 31.195,70.625 VT3.3
NetC39_2: C39.2 DA3.2 R34.1 | length 8.2
  Top Layer w0.5: DA3.2 15.282,77.468 16.5,76.25 R34.1 19.45,79.2 C39.2
NetDA1_1: DA1.1 R3.2 R4.1 | length 6.8
  Top Layer w0.5: DA1.1 DA1.1@30.3,26.59 ; R3.2 DA1.1@30.3,26.59 ; R4.1 33.421,26.621 31.759,26.621 31.68,26.7 30.41,26.7 DA1.1@30.3,26.59
NetDA1_2: DA1.2 R3.1 X2.1 | length 22.3
  Top Layer w0.5: DA1.2 28.96,27.96 28.734,27.734 28.734,26.173 28.75,26.157 28.75,23.3 R3.1 28.7,22.3 32.15,18.85 X2.1
NetDA1_6: DA1.6 R9.2 R10.2 R11.2 R12.2 R13.2 R14.2 | length 21
  Top Layer w0.5: R9.2 R10.2 R11.2 R12.2 35.63,39.45 ; DA1.6 33.04,33.04 33.5,33.5 R13.2 34.396,34.15 34.746,34.5 34.746,35.746 34.75,35.75 34.75,37.25 35.63,38.13 35.63,39.45 ; R14.2 35.63,39.45
NetDA1_7: DA1.7 R13.1 R15.1 TP2.1 | length 10.5
  Top Layer w0.5: R15.1 29.65,36.5 30.2,35.95 ; 31.8,33.9 31.39,34.31 DA1.7 30.2,35.95 ; TP2.1 32.4,35.75 ; R13.1 32.4,35.75 ; 30.2,35.95 30.25,36 30.75,36 31,35.75 32.4,35.75
NetDA1_8: DA1.8 R19.2 R22.1 | length 7.7
  Top Layer w0.5: R22.1 18.8,35.7 19.95,34.55 R19.2 22.95,34.55 23.19,34.31 DA1.8
NetDA1_9: DA1.9 R18.1 R19.1 | length 5.9
  Top Layer w0.5: R18.1 20.25,32.75 20.5,33 21.7,33 R19.1 22.95,32.95 23.04,33.04 DA1.9
NetDA1_10: DA1.10 R15.2 | length 6.5
  Top Layer w0.5: DA1.10 26.02,31.77 26.75,32.5 26.75,36.45 R15.2
NetDA1_12: DA1.12 R16.2 R17.2 | length 9.2
  Top Layer w0.5: R16.2 18.75,30.4 R17.2 20.354,28.996 24.378,28.996 DA1.12
NetDA3_1: DA3.1 R30.1 R31.2 | length 5.4
  Top Layer w0.5: R30.1 DA3.1 R31.2
NetJ1_9: J1.9 R14.1 | length 3.4
  Top Layer w0.5: J1.9 36.89,41.06 R14.1
NetJ1_10: J1.10 R12.1 | length 3.4
  Top Layer w0.5: J1.10 34.35,41.061 R12.1
NetJ1_11: J1.11 R11.1 | length 3.4
  Top Layer w0.5: J1.11 31.81,41.061 R11.1
NetJ1_12: J1.12 R10.1 | length 3.4
  Top Layer w0.5: J1.12 29.27,41.062 R10.1
NetJ1_13: J1.13 R9.1 | length 3.4
  Top Layer w0.5: J1.13 26.73,41.063 R9.1
NetJ1_14: J1.14 R26.2 R37.2 | length 5.5
  Top Layer w0.5: R26.2 24.25,41.75 ; J1.14 24.19,41.81 24.25,41.75 ; R37.2@24.5,41.3 R37.2 24.75,41.25 24.25,41.75
NetJ1_15: J1.15 R25.2 R36.2 | length 7.1
  Top Layer w0.5: R25.2 19.25,41.45 19.25,41.75 20,41.75 R36.2@20.25,42 ; R36.2 R36.2@20.25,42 ; J1.15 21.65,43.9 20.25,42.5 R36.2@20.25,42
NetJ1_16: J1.16 R24.2 | length 3.5
  Top Layer w0.5: R24.2 18.25,42 19.11,42.86 J1.16
NetJ2_1: J2.1 R27.1 VT1.1 | length 8.9
  Top Layer w0.5: R27.1 28,72.25 28.71,72.96 VT1.1
  Top Layer w0.7: VT1.1 30.5,72.95 J2.1
NetJ3_1: J3.1 R33.1 VT3.1 | length 15.6
  Top Layer w0.7: VT3.1 R33.1
  Bottom Layer w0.7: VT3.1 34.6,77.5 37.1,75 J3.1
NetR5_2: R5.2 X4.1 | length 3.4
  Top Layer w0.25: X4.1 9.9,7.353 10.947,8.4 R5.2
NetR6_1: R6.1 VD1.2 | length 8.7
  Top Layer w0.7: VD1.2 9.55,13.25 R6.1
NetR7_2: R7.2 X5.4 | length 4.4
  Top Layer w0.5: R7.2 39.4,37.3 39.7,37 40.94,37 X5.4
NetR22_2: R22.2 TP3.1 X6.1 | length 13.3
  Top Layer w0.5: X6.1 13.25,47 14.5,45.75 TP3.1 15.7,37 R22.2
NetR31_1: R31.1 R35.2 VT2.1 | length 6.9
  Top Layer w0.5: R31.1 19.224,84.3 VT2.1 19.234,83.016 19.5,82.75 19.5,82.05 R35.2
NetVT3_2: VT3.2 X7.1 | length 9.1
  Top Layer w0.5: VT3.2 VT3.2@33.55,75.15
  Top Layer w0.7: VT3.2 42.46,75.21 X7.1
NetX3_A4: X3.A4 X3.A9 X3.B4 X3.B9 X4.4 | length 23.8
  Top Layer w0.3: 26.25,8.75 X3.A4 26.25,10.25 28.75,10.25 X3.A9 28.75,8.75
  Top Layer w0.5: 26.25,8.75 26.3,8.7 X3.B9 ; X3.B4 28.7,8.7 28.75,8.75
  Bottom Layer w0.5: X3.B9 X3.B9@26.325,8.45
  Bottom Layer w0.7: X4.4 17.52,7.22 21.3,11 26.2,11 ; 26.225,8.75 26.2,8.775 26.2,11 ; X3.B4@28.775,8.6 28.775,9.01 26.785,11 26.2,11
pads on no net: DA2.8 DA2.14 R16.1 R23.2 X1.0 X2.0 X3. X3.A2 X3.A3 X3.A5 X3.A6 X3.A7 X3.A8 X3.A10 X3.A11 X3.B2 X3.B3 X3.B5 X3.B6 X3.B7 X3.B8 X3.B10 X3.B11 X6.0 X7.0

## Polygon pours and split planes (outlines as drawn)
GND on Top Layer "GND_L01_P004" (solid, remove dead copper, pour order 4): 54,93 54,1 1,1 1,93
no net on Top Layer "NONET_L01_P000" (solid, remove dead copper, pour order 0): 33.5,92.5
GND on Bottom Layer "GND_L04_P006" (solid, remove dead copper, pour order 6): 54,93 54,1 1,1 1,93
GND on Signal Layer 2 "GND_L03_P010" (solid, remove dead copper, pour order 10): 54,93 54,1 1,1 1,93
GND on Signal Layer 1 "GND_L02_P008" (solid, remove dead copper, pour order 8): 54,93 54,1 1,1 1,93

## Silkscreen, mask and mechanical layers (free items; w line width, h text height)
Top Overlay:
  lines w0.3: 33.1,41.2 33.1,38.9 33.7,38.3 33.7,36.9
Bottom Overlay:
  text "GND" at 70,8 h1.1
Mechanical 3:
  lines w0.1: 0,0.5 0,0 ; 55,94 0,94 0,0 ; 0,0 0,1 ; 0,1 0,1
  lines w0.3: 27.5,1.25 27.5,21 ; 0,0 55,0 55,94 0,94 0,0
Mechanical 17:
  lines w0.1: 0,0 0,1
  lines w0.3: 27.5,0.394 27.5,95.6 ; 51.5,0.394 51.5,94.9

## Dimensions
51.5,2.75 to 51.5,91.25 on Mechanical 16
51.5,2.75 to 57.5,0 on Mechanical 16
3.5,2.75 to 0,0 on Mechanical 16
55,94 to 55,0 on Mechanical 16
3.5,91.25 to 3.5,2.75 on Mechanical 16
3.5,2.75 to 51.5,2.75 on Mechanical 16
3.5,91.25 to 51.5,91.25 on Mechanical 16
51.5,2.75 to 55,-1.25 on Mechanical 16
51.5,91.25 to 64,94 on Mechanical 16
51.5,91.25 to 55,94 on Mechanical 16
3.5,91.25 to 0,101 on Mechanical 16
3.5,91.25 to 0,94 on Mechanical 16
3.5,2.75 to 0,0 on Mechanical 16
0,94 to 55,94 on Mechanical 16
166,105 to 166,187 on Mechanical 16
5,5 to 66,5 on Mechanical 16

## Text inside footprints (layer, text, board x,y; h text height)
DA2: Top Overlay "*" at 2.371,15.562 h1.27 r90; Mechanical 13 "*" at 2.371,15.562 h1.27 r90
VT1: Top Overlay "B" at 31.19,79.385 h1.5 r90; Top Overlay "E" at 28.375,69.825 h1.5 r270
VT3: Top Overlay "B" at 32.79,71.075 h1.5 r270; Top Overlay "E" at 35.725,80.375 h1.5 r90
X4: Bottom Overlay "1" at 7.4,3.7 h1; Mechanical 14 "1" at 9.69,4.605 h1 r180
X5: Bottom Overlay "1" at 45.1,28.4 h1 r270; Mechanical 14 "1" at 43.195,28.31 h1 r270